# EAGLE board uc_relais_battery_devel_rev_a_3.3.2014 (EAGLE 6.5.0), part 1 of 2
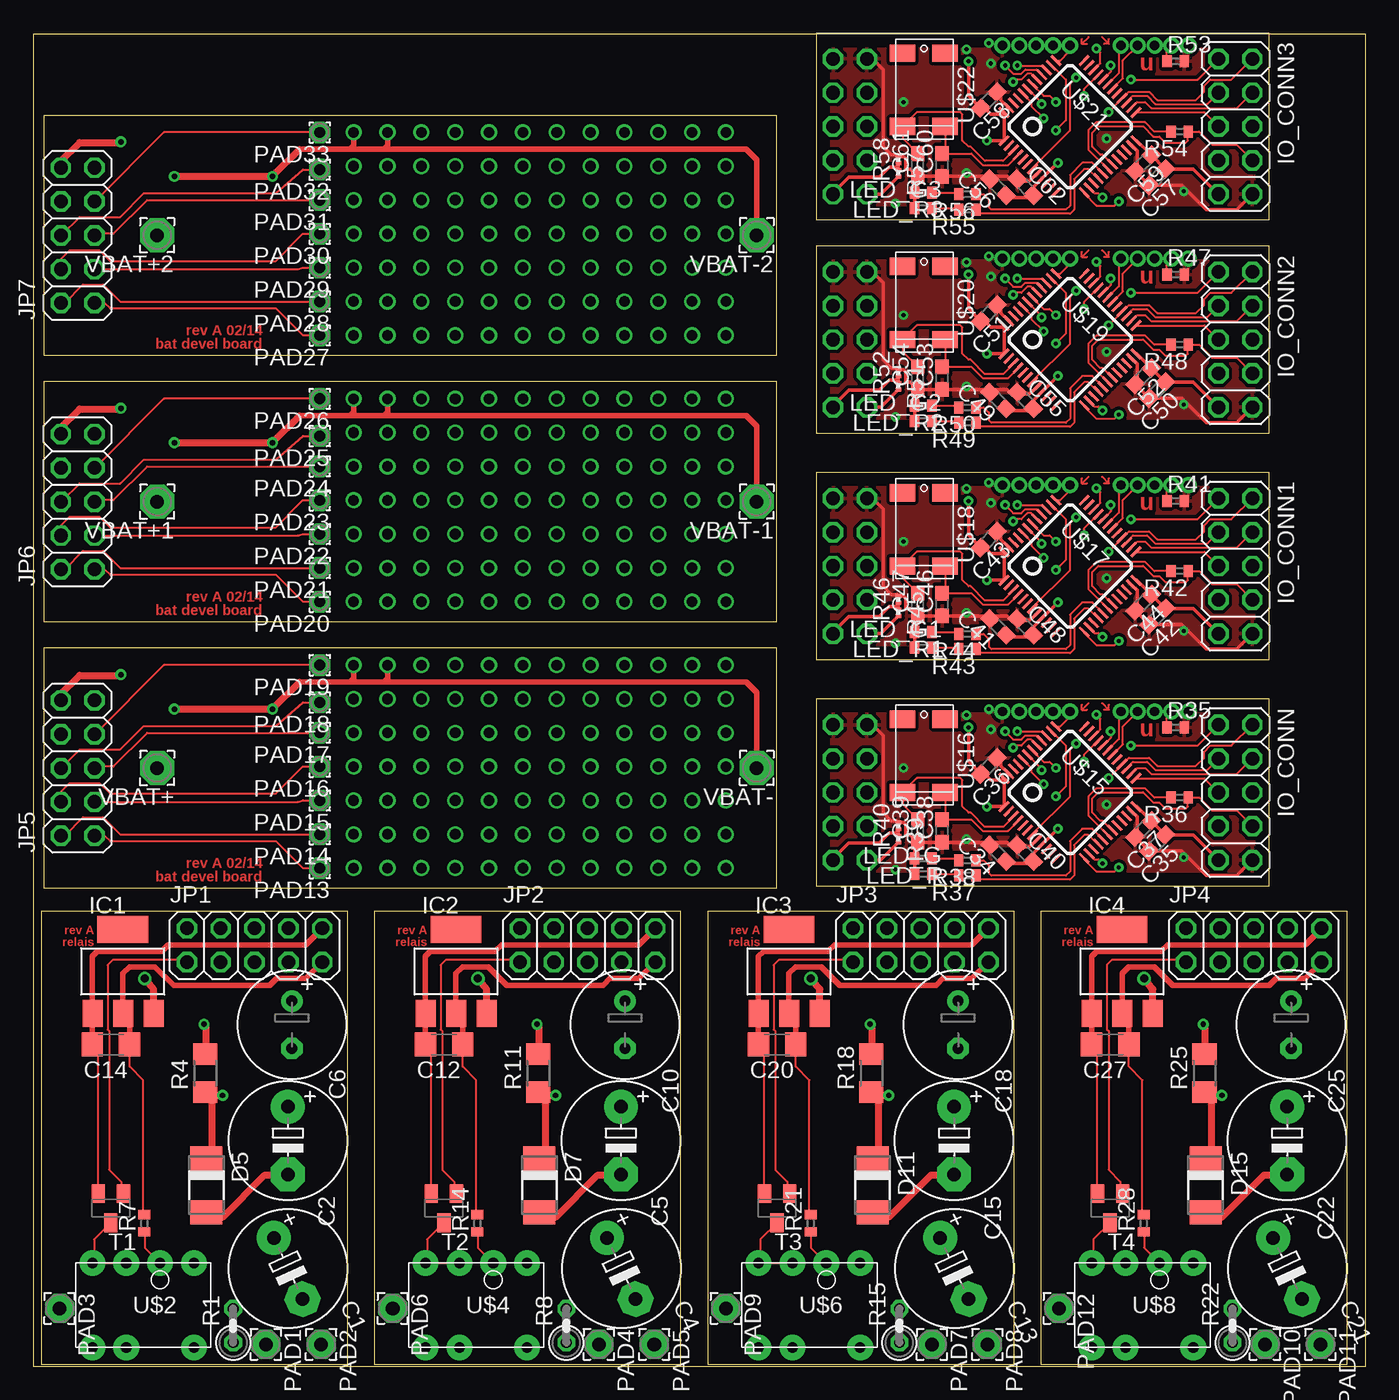
[diagram p0: board, top side]
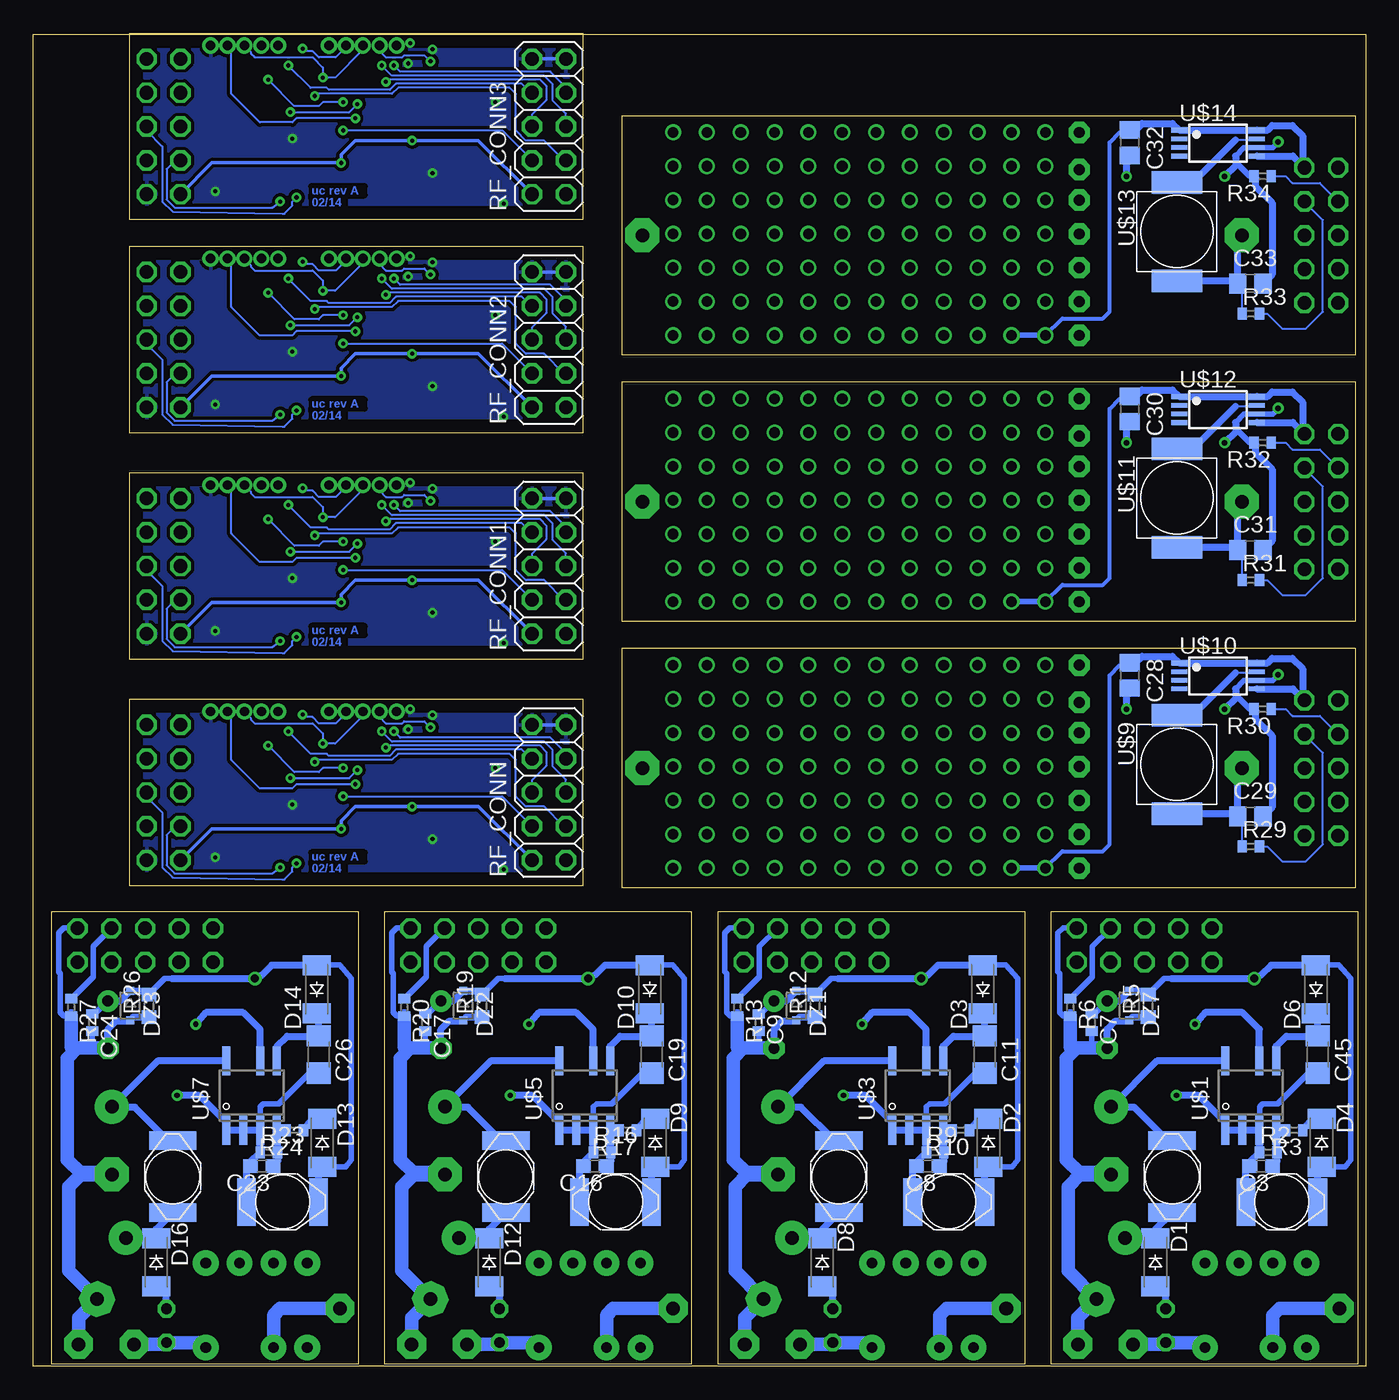
[diagram p1: board, bottom side, seen from below]

Size 100 x 100.08 mm. Coordinates in mm from the lower left corner, seen from the top.
Outline: 0,0 100,0 100,100 0,100 0,0
Outline: 23.61,0.14 23.61,34.14 0.6,34.14 0.6,0.14 23.61,0.14
Outline: 48.6,0.14 48.6,34.14 25.61,34.14 25.61,0.14 48.6,0.14
Outline: 73.61,0.14 73.61,34.14 50.6,34.14 50.6,0.14 73.61,0.14
Outline: 98.61,0.14 98.61,34.14 75.61,34.14 75.61,0.14 98.61,0.14
Outline: 55.79,53.91 0.79,53.91 0.79,35.91 55.79,35.91 55.79,53.91
Outline: 55.79,73.91 0.79,73.91 0.79,55.91 55.79,55.91 55.79,73.91
Outline: 55.79,93.91 0.79,93.91 0.79,75.91 55.79,75.91 55.79,93.91
Outline: 58.76,36.08 92.76,36.08 92.76,50.08 58.76,50.08 58.76,36.08
Outline: 58.76,53.08 92.76,53.08 92.76,67.08 58.76,67.08 58.76,53.08
Outline: 58.76,70.08 92.76,70.08 92.76,84.08 58.76,84.08 58.76,70.08
Outline: 58.76,86.08 92.76,86.08 92.76,100.08 58.76,100.08 58.76,86.08
Copper layers (1*16): Top 0.035mm / dielectric 1.5mm / Bottom 0.035mm
Design rules "default": minimum track width 10mil, minimum drill 24mil, track to track 8mil, track to pad 8mil, pad to pad 8mil, via to via 8mil, smd to smd 8mil, copper to edge 40mil, drill to drill 8mil, minimum pad ring 10mil, minimum via ring 8mil, stop-mask expansion 4mil, vias tented up to drill 0mil, thermal gap 10mil

## Footprints (pad centres in the part's own frame; a part is rotated, then mirrored left to right if it is on the bottom)
E5-8,5 = drill 1.016 pad 2.54: + -2.54,0 | drill 1.016 pad 2.54 octagon: - 2.54,0
C0603 = smd 1.1 x 1: 1 -0.85,0; 2 0.85,0
E3,5-8 = drill 0.813 pad 1.6: + -1.778,0 | drill 0.813 pad 1.6 octagon: - 1.778,0
C0402 = smd 0.7 x 0.9: 1 -0.65,0; 2 0.65,0
C1206 = smd 1.6 x 1.8: 1 -1.4,0; 2 1.4,0
C0805 = smd 1.3 x 1.5: 1 -0.95,0; 2 0.95,0
SOD-123_MINI-SMA = smd 1.5 x 2.1: A 1.8,0; C -1.8,0
DO-214AC = smd 1.8 x 2.4: A 2.025,0; C -2.025,0
05HEADER = drill 0.711 pad 0.762: P$1 -2.54,0; P$2 -1.27,0; P$3 0,0; P$4 1.27,0; P$5 2.54,0
SOD323-R = smd 0.6 x 0.6: A 1.1,0; C -1.1,0
SOT223 = smd 1.499 x 2.007: 1 -2.261,-3.15; 2 0.025,-3.15; 3 2.311,-3.15 | smd 3.81 x 2.007: 4 0,3.15
2X05 = drill 1.016 octagon: 1 -5.08,-1.27; 2 -5.08,1.27; 3 -2.54,-1.27; 4 -2.54,1.27; 5 0,-1.27; 6 0,1.27; 7 2.54,-1.27; 8 2.54,1.27; 9 5.08,-1.27; 10 5.08,1.27
INDUCTOR = smd 1.4 x 3.56: P$1 -2.7,0; P$2 2.7,0
R0402 = smd 0.7 x 0.9: 1 -0.65,0; 2 0.65,0
2,15/1,0 = drill 1.016 pad 2.159 octagon: 1 0,0
1,6/0,8 = drill 0.813 pad 1.6 octagon: 1 0,0
0207/2V = drill 0.813 octagon: 1 -1.27,0; 2 1.27,0
R1206 = smd 1.6 x 1.803: 1 -1.422,0; 2 1.422,0
R0603 = smd 1 x 1.1: 1 -0.85,0; 2 0.85,0
R0201 = smd 0.28 x 0.43: 1 -0.255,0; 2 0.255,0
SOT23-BEC = smd 1 x 1.4: B -0.95,-1.1; C 0,1.1; E 0.95,-1.1
SO7 = smd 0.6 x 2.2: 1 -2.375,-2.56; 2 -1.105,-2.56; 3 0.165,-2.56; 4 1.435,-2.56; 5 1.435,2.64; 6 0.165,2.64; 7 -2.375,2.64
DIP7 = drill 0.8 pad 1.93: P$1 -5.08,-2.54; P$2 -2.54,-2.54; P$3 0,-2.54; P$4 2.54,-2.54; P$5 2.54,3.81; P$6 0,3.81; P$7 -5.08,3.81
ELL6_INDUCTOR = smd 1.7 x 3.8: P$1 -3.7,0; P$2 3.7,0
TSSOP8 = smd 1.2 x 0.35: 1 -2.925,0.975; 2 -2.925,0.325; 3 -2.925,-0.325; 4 -2.925,-0.975; 5 2.925,-0.975; 6 2.925,-0.325; 7 2.925,0.325; 8 2.925,0.975
LQFP48 = smd 0.2 x 1: 1 -2.75,-4.25; 2 -2.25,-4.25; 3 -1.75,-4.25; 4 -1.25,-4.25; 5 -0.75,-4.25; 6 -0.25,-4.25; 7 0.25,-4.25; 8 0.75,-4.25; 9 1.25,-4.25; 10 1.75,-4.25; 11 2.25,-4.25; 12 2.75,-4.25; 25 2.75,4.25; 26 2.25,4.25; 27 1.75,4.25; 28 1.25,4.25; 29 0.75,4.25; 30 0.25,4.25; 31 -0.25,4.25; 32 -0.75,4.25; 33 -1.25,4.25; 34 -1.75,4.25; 35 -2.25,4.25; 36 -2.75,4.25 | smd 1 x 0.2: 13 4.25,-2.75; 14 4.25,-2.25; 15 4.25,-1.75; 16 4.25,-1.25; 17 4.25,-0.75; 18 4.25,-0.25; 19 4.25,0.25; 20 4.25,0.75; 21 4.25,1.25; 22 4.25,1.75; 23 4.25,2.25; 24 4.25,2.75; 37 -4.25,2.75; 38 -4.25,2.25; 39 -4.25,1.75; 40 -4.25,1.25; 41 -4.25,0.75; 42 -4.25,0.25; 43 -4.25,-0.25; 44 -4.25,-0.75; 45 -4.25,-1.25; 46 -4.25,-1.75; 47 -4.25,-2.25; 48 -4.25,-2.75
SOJ4 = smd 1.3 x 1.9: P$1 -2.75,-1.6; P$2 2.75,-1.6; P$3 2.75,1.6; P$4 -2.75,1.6
2,54/1,0 = drill 1.016 pad 2.54 octagon: 1 0,0

## Placement (x,y rotation side)
C1  [E5-8,5]  19.13,7.33 295 top
C2  [E5-8,5]  19.11,16.94 270 top
C3  [C0603]  7.85,15.02 180 bottom
C4  [E5-8,5]  44.13,7.33 295 top
C5  [E5-8,5]  44.1,16.94 270 top
C6  [E3,5-8]  19.41,25.64 270 top
C7  [C0402]  20.57,25.81 270 bottom
C8  [C0603]  32.85,15.02 180 bottom
C9  [C0402]  45.57,25.81 270 bottom
C10  [E3,5-8]  44.41,25.64 270 top
C11  2.2u  [C1206]  28.58,23.4 270 bottom
C12  2.2u  [C1206]  30.82,24.14 180 top
C13  [E5-8,5]  69.13,7.33 295 top
C14  2.2u  [C1206]  5.83,24.14 180 top
C15  [E5-8,5]  69.11,16.94 270 top
C16  [C0603]  57.85,15.02 180 bottom
C17  [C0402]  70.57,25.81 270 bottom
C18  [E3,5-8]  69.41,25.64 270 top
C19  2.2u  [C1206]  53.58,23.4 270 bottom
C20  2.2u  [C1206]  55.83,24.14 180 top
C21  [E5-8,5]  94.13,7.33 295 top
C22  [E5-8,5]  94.11,16.94 270 top
C23  [C0603]  82.85,15.02 180 bottom
C24  [C0402]  95.57,25.81 270 bottom
C25  [E3,5-8]  94.41,25.64 270 top
C26  2.2u  [C1206]  78.58,23.4 270 bottom
C27  2.2u  [C1206]  80.83,24.14 180 top
C28  22u  [C0805]  17.71,51.87 270 bottom
C29  22u  [C0805]  8.65,41.29 0 bottom
C30  22u  [C0805]  17.71,71.87 270 bottom
C31  22u  [C0805]  8.65,61.29 0 bottom
C32  22u  [C0805]  17.71,91.87 270 bottom
C33  22u  [C0805]  8.65,81.29 0 bottom
C34  4u7  [C0603]  72.4,38.51 135 top
C35  4u7  [C0603]  84.36,39.28 225 top
C36  100n  [C0603]  71.71,45.07 225 top
C37  100n  [C0603]  83.3,40.34 225 top
C38  7p  [C0603]  68.21,40.19 90 top
C39  7p  [C0603]  66.38,40.19 90 top
C40  100n  [C0603]  74.46,38.51 315 top
C41  4u7  [C0603]  72.4,55.51 135 top
C42  4u7  [C0603]  84.36,56.28 225 top
C43  100n  [C0603]  71.71,62.07 225 top
C44  100n  [C0603]  83.3,57.34 225 top
C45  2.2u  [C1206]  3.58,23.4 270 bottom
C46  7p  [C0603]  68.21,57.19 90 top
C47  7p  [C0603]  66.38,57.19 90 top
C48  100n  [C0603]  74.46,55.51 315 top
C49  4u7  [C0603]  72.4,72.51 135 top
C50  4u7  [C0603]  84.36,73.28 225 top
C51  100n  [C0603]  71.71,79.07 225 top
C52  100n  [C0603]  83.3,74.34 225 top
C53  7p  [C0603]  68.21,74.19 90 top
C54  7p  [C0603]  66.38,74.19 90 top
C55  100n  [C0603]  74.46,72.51 315 top
C56  4u7  [C0603]  72.4,88.51 135 top
C57  4u7  [C0603]  84.36,89.28 225 top
C58  100n  [C0603]  71.71,95.07 225 top
C59  100n  [C0603]  83.3,90.34 225 top
C60  7p  [C0603]  68.21,90.19 90 top
C61  7p  [C0603]  66.38,90.19 90 top
C62  100n  [C0603]  74.46,88.51 315 top
D1  CGRM4001-G  [SOD-123_MINI-SMA]  15.78,7.79 270 bottom
D2  CGRM4001-G  [SOD-123_MINI-SMA]  28.31,16.77 270 bottom
D3  CGRM4001-G  [SOD-123_MINI-SMA]  28.73,28.3 90 bottom
D4  CGRM4001-G  [SOD-123_MINI-SMA]  3.31,16.77 270 bottom
D5  [DO-214AC]  12.99,13.59 270 top
D6  CGRM4001-G  [SOD-123_MINI-SMA]  3.73,28.3 90 bottom
D7  [DO-214AC]  37.99,13.59 270 top
D8  CGRM4001-G  [SOD-123_MINI-SMA]  40.78,7.79 270 bottom
D9  CGRM4001-G  [SOD-123_MINI-SMA]  53.31,16.77 270 bottom
D10  CGRM4001-G  [SOD-123_MINI-SMA]  53.73,28.3 90 bottom
D11  [DO-214AC]  62.99,13.59 270 top
D12  CGRM4001-G  [SOD-123_MINI-SMA]  65.78,7.79 270 bottom
D13  CGRM4001-G  [SOD-123_MINI-SMA]  78.31,16.77 270 bottom
D14  CGRM4001-G  [SOD-123_MINI-SMA]  78.73,28.3 90 bottom
D15  [DO-214AC]  87.99,13.59 270 top
D16  CGRM4001-G  [SOD-123_MINI-SMA]  90.78,7.79 270 bottom
DBG  [05HEADER]  75.27,49.16 180 top
DBG1  [05HEADER]  75.27,66.16 180 top
DBG2  [05HEADER]  75.27,83.16 180 top
DBG3  [05HEADER]  75.27,99.16 180 top
DZ1  [SOD323-R]  42.74,27.07 270 bottom
DZ2  [SOD323-R]  67.74,27.07 270 bottom
DZ3  [SOD323-R]  92.74,27.07 270 bottom
DZ7  [SOD323-R]  17.74,27.07 270 bottom
IC1  REG1117  [SOT223]  6.72,29.64 0 top
IC2  REG1117  [SOT223]  31.72,29.64 0 top
IC3  REG1117  [SOT223]  56.72,29.64 0 top
IC4  REG1117  [SOT223]  81.72,29.64 0 top
IO_CONN  [2X05]  90.22,43.08 270 top
IO_CONN1  [2X05]  90.22,60.08 270 top
IO_CONN2  [2X05]  90.22,77.08 270 top
IO_CONN3  [2X05]  90.22,93.08 270 top
JP1  [2X05]  16.61,31.6 0 top
JP2  [2X05]  41.6,31.6 0 top
JP3  [2X05]  66.61,31.6 0 top
JP4  [2X05]  91.61,31.6 0 top
JP5  [2X05]  3.33,44.91 90 top
JP6  [2X05]  3.33,64.91 90 top
JP7  [2X05]  3.33,84.91 90 top
L1  INDUCTOR  [INDUCTOR]  14.53,14.23 90 bottom
L2  INDUCTOR  [INDUCTOR]  6.29,12.33 180 bottom
L3  INDUCTOR  [INDUCTOR]  39.53,14.23 90 bottom
L4  INDUCTOR  [INDUCTOR]  31.3,12.33 180 bottom
L5  INDUCTOR  [INDUCTOR]  64.53,14.23 90 bottom
L6  INDUCTOR  [INDUCTOR]  56.3,12.33 180 bottom
L7  INDUCTOR  [INDUCTOR]  89.53,14.23 90 bottom
L8  INDUCTOR  [INDUCTOR]  81.3,12.33 180 bottom
LED_G  [R0402]  66.79,36.95 180 top
LED_G1  [R0402]  66.79,53.95 180 top
LED_G2  [R0402]  66.79,70.95 180 top
LED_G3  [R0402]  66.79,86.95 180 top
LED_R  [R0402]  66.79,38.11 180 top
LED_R1  [R0402]  66.79,55.11 180 top
LED_R2  [R0402]  66.79,72.11 180 top
LED_R3  [R0402]  66.79,88.11 180 top
PAD1  [2,15/1,0]  17.45,1.64 270 top
PAD2  [2,15/1,0]  21.61,1.64 270 top
PAD3  [2,15/1,0]  1.98,4.34 270 top
PAD4  [2,15/1,0]  42.45,1.64 270 top
PAD5  [2,15/1,0]  46.6,1.64 270 top
PAD6  [2,15/1,0]  26.98,4.34 270 top
PAD7  [2,15/1,0]  67.45,1.64 270 top
PAD8  [2,15/1,0]  71.61,1.64 270 top
PAD9  [2,15/1,0]  51.98,4.34 270 top
PAD10  [2,15/1,0]  92.45,1.64 270 top
PAD11  [2,15/1,0]  96.61,1.64 270 top
PAD12  [2,15/1,0]  76.98,4.34 270 top
PAD13  [1,6/0,8]  21.5,37.4 180 top
PAD14  [1,6/0,8]  21.5,39.94 180 top
PAD15  [1,6/0,8]  21.5,42.48 180 top
PAD16  [1,6/0,8]  21.5,45.02 180 top
PAD17  [1,6/0,8]  21.5,47.56 180 top
PAD18  [1,6/0,8]  21.5,49.84 180 top
PAD19  [1,6/0,8]  21.5,52.64 180 top
PAD20  [1,6/0,8]  21.5,57.4 180 top
PAD21  [1,6/0,8]  21.5,59.94 180 top
PAD22  [1,6/0,8]  21.5,62.48 180 top
PAD23  [1,6/0,8]  21.5,65.02 180 top
PAD24  [1,6/0,8]  21.5,67.56 180 top
PAD25  [1,6/0,8]  21.5,69.84 180 top
PAD26  [1,6/0,8]  21.5,72.64 180 top
PAD27  [1,6/0,8]  21.5,77.4 180 top
PAD28  [1,6/0,8]  21.5,79.94 180 top
PAD29  [1,6/0,8]  21.5,82.48 180 top
PAD30  [1,6/0,8]  21.5,85.02 180 top
PAD31  [1,6/0,8]  21.5,87.56 180 top
PAD32  [1,6/0,8]  21.5,89.84 180 top
PAD33  [1,6/0,8]  21.5,92.64 180 top
R1  [0207/2V]  15.01,3.04 90 top
R2  [R0402]  7.32,16.07 0 bottom
R3  [R0402]  5.38,17.73 180 bottom
R4  [R1206]  12.9,22.01 90 top
R5  [R0603]  16.32,27.05 90 bottom
R6  1M  [R0402]  22.16,26.94 270 bottom
R7  100  [R0402]  8.34,10.74 90 top
R8  [0207/2V]  40.01,3.04 90 top
R9  [R0402]  32.32,16.07 0 bottom
R10  [R0402]  30.38,17.73 180 bottom
R11  [R1206]  37.9,22.01 90 top
R12  [R0603]  41.32,27.05 90 bottom
R13  1M  [R0402]  47.16,26.94 270 bottom
R14  100  [R0402]  33.34,10.74 90 top
R15  [0207/2V]  65,3.04 90 top
R16  [R0402]  57.32,16.07 0 bottom
R17  [R0402]  55.38,17.73 180 bottom
R18  [R1206]  62.9,22.01 90 top
R19  [R0603]  66.32,27.05 90 bottom
R20  1M  [R0402]  72.16,26.94 270 bottom
R21  100  [R0402]  58.34,10.74 90 top
R22  [0207/2V]  90,3.04 90 top
R23  [R0402]  82.32,16.07 0 bottom
R24  [R0402]  80.38,17.73 180 bottom
R25  [R1206]  87.9,22.01 90 top
R26  [R0603]  91.32,27.05 90 bottom
R27  1M  [R0402]  97.16,26.94 270 bottom
R28  100  [R0402]  83.33,10.74 90 top
R29  0  [R0402]  8.61,39.01 0 bottom
R30  1M  [R0402]  7.73,49.34 180 bottom
R31  0  [R0402]  8.61,59.01 0 bottom
R32  1M  [R0402]  7.73,69.34 180 bottom
R33  0  [R0402]  8.61,79.01 0 bottom
R34  1M  [R0402]  7.73,89.34 180 bottom
R35  10k  [R0402]  85.73,47.96 0 top
R36  1M  [R0402]  86.04,42.7 180 top
R37  1k  [R0402]  70.11,36.84 180 top
R38  1k  [R0402]  70.11,37.98 180 top
R39  0R/NA  [R0201]  64.93,40.57 270 top
R40  0R/NA  [R0201]  64.93,39.57 90 top
R41  10k  [R0402]  85.73,64.96 0 top
R42  1M  [R0402]  86.04,59.7 180 top
R43  1k  [R0402]  70.11,53.84 180 top
R44  1k  [R0402]  70.11,54.98 180 top
R45  0R/NA  [R0201]  64.93,57.57 270 top
R46  0R/NA  [R0201]  64.93,56.57 90 top
R47  10k  [R0402]  85.73,81.96 0 top
R48  1M  [R0402]  86.04,76.7 180 top
R49  1k  [R0402]  70.11,70.84 180 top
R50  1k  [R0402]  70.11,71.98 180 top
R51  0R/NA  [R0201]  64.93,74.57 270 top
R52  0R/NA  [R0201]  64.93,73.57 90 top
R53  10k  [R0402]  85.73,97.96 0 top
R54  1M  [R0402]  86.04,92.7 180 top
R55  1k  [R0402]  70.11,86.84 180 top
R56  1k  [R0402]  70.11,87.98 180 top
R57  0R/NA  [R0201]  64.93,90.57 270 top
R58  0R/NA  [R0201]  64.93,89.57 90 top
RF_CONN  [2X05]  61.3,43.08 90 bottom
RF_CONN1  [2X05]  61.3,60.08 90 bottom
RF_CONN2  [2X05]  61.3,77.08 90 bottom
RF_CONN3  [2X05]  61.3,93.08 90 bottom
T1  MMUN2233  [SOT23-BEC]  5.82,11.87 180 top
T2  MMUN2233  [SOT23-BEC]  30.82,11.87 180 top
T3  MMUN2233  [SOT23-BEC]  55.82,11.87 180 top
T4  MMUN2233  [SOT23-BEC]  80.82,11.87 180 top
U$1  TEA1721  [SO7]  8.15,20.28 0 bottom
U$2  PR3BMF51  [DIP7]  6.98,5.21 180 top
U$3  TEA1721  [SO7]  33.15,20.28 0 bottom
U$4  PR3BMF51  [DIP7]  31.98,5.21 180 top
U$5  TEA1721  [SO7]  58.15,20.28 0 bottom
U$6  PR3BMF51  [DIP7]  56.98,5.21 180 top
U$7  TEA1721  [SO7]  83.15,20.28 0 bottom
U$8  PR3BMF51  [DIP7]  81.98,5.21 180 top
U$9  ELL_INDUCTOR  [ELL6_INDUCTOR]  14.17,45.19 270 bottom
U$10  L6920  [TSSOP8]  11.08,51.83 0 bottom
U$11  ELL_INDUCTOR  [ELL6_INDUCTOR]  14.17,65.19 270 bottom
U$12  L6920  [TSSOP8]  11.08,71.83 0 bottom
U$13  ELL_INDUCTOR  [ELL6_INDUCTOR]  14.17,85.19 270 bottom
U$14  L6920  [TSSOP8]  11.08,91.83 0 bottom
U$15  STM32F051  [LQFP48]  77.81,43.08 315 top
U$16  CRYSTAL_32K  [SOJ4]  66.84,45.83 90 top
U$17  STM32F051  [LQFP48]  77.81,60.08 315 top
U$18  CRYSTAL_32K  [SOJ4]  66.84,62.83 90 top
U$19  STM32F051  [LQFP48]  77.81,77.08 315 top
U$20  CRYSTAL_32K  [SOJ4]  66.84,79.83 90 top
U$21  STM32F051  [LQFP48]  77.81,93.08 315 top
U$22  CRYSTAL_32K  [SOJ4]  66.84,95.83 90 top
UART  [05HEADER]  84.16,49.16 0 top
UART1  [05HEADER]  84.16,66.16 0 top
UART2  [05HEADER]  84.16,83.16 0 top
UART3  [05HEADER]  84.16,99.16 0 top
VBAT+  [2,54/1,0]  9.29,44.91 180 top
VBAT+1  [2,54/1,0]  9.29,64.91 180 top
VBAT+2  [2,54/1,0]  9.29,84.91 180 top
VBAT-  [2,54/1,0]  54.29,44.91 180 top
VBAT-1  [2,54/1,0]  54.29,64.91 180 top
VBAT-2  [2,54/1,0]  54.29,84.91 180 top

## Library data of the parts
C1 C2 C4 C5 C13 C15 C21 C22 = rcl; DIGIKEY: 1189-1633-1-ND
C3 C8 C16 C23 = rcl; DIGIKEY: 399-8979-1-ND
C6 C10 C18 C25 = rcl; DIGIKEY: 493-1043-ND
C7 C9 C17 C24 = rcl; DIGIKEY: 1276-1028-1-ND
C11 C12 C14 C19 C20 C26 C27 C45 = rcl; DIGIKEY: 1276-2723-1-ND
C28-C33 = rcl; DIGIKEY: 1276-1100-1-ND
C34 C35 C41 C42 C49 C50 C56 C57 = rcl; DIGIKEY: 1276-2087-1-ND
C36 C37 C40 C43 C44 C48 C51 C52 C55 C58 C59 C62 = rcl; DIGIKEY: 445-4711-1-ND
C38 C39 C46 C47 C53 C54 C60 C61 = rcl; DIGIKEY: 1276-2136-1-ND
D1 D8 D12 D16 = diode; REICHELT: S 1ML SMD
D2-D4 D6 D9 D10 D13 D14 = diode; REICHELT: ES 1JL SMD
D5 D7 D11 D15 = diode; DIGIKEY: BYG20J-E3/TRGICT-ND
DBG DBG1-DBG3 UART UART1-UART3 = viskos
DZ1-DZ3 DZ7 = diode; DIGIKEY: 568-3810-1-ND
IC1-IC4 = burr-brown; DIGIKEY: AP1117IE33G-13DICT-ND; MPN: REG1117; OC_FARNELL: 1097566; OC_NEWARK: 14P6981
IO_CONN IO_CONN1-IO_CONN3 = pinhead; DIGIKEY: 609-3243-ND
JP1-JP7 RF_CONN RF_CONN1-RF_CONN3 = pinhead; DIGIKEY: S6105-ND
L1 L3 L5 L7 = fastron_pisg_inductors; REICHELT: L-PISG 1,0M
L2 L4 L6 L8 = fastron_pisg_inductors; REICHELT: L-PISR 1,0M
LED_G LED_G1-LED_G3 = rcl; DIGIKEY: 754-1101-1-ND
LED_R LED_R1-LED_R3 = rcl; DIGIKEY: 754-1104-1-ND
PAD1-PAD33 VBAT+ VBAT+1 VBAT+2 VBAT- VBAT-1 VBAT-2 = wirepad
R1 R8 R15 R22 = rcl; DIGIKEY: CF14JT47R0CT-ND
R2 R9 R16 R23 = rcl; DIGIKEY: 1276-3466-1-ND
R3 R10 R17 R24 = rcl; DIGIKEY: RHM18KCDCT-ND
R4 R11 R18 R25 = rcl; DIGIKEY: 311-1.0ERCT-ND
R5 R12 R19 R26 = rcl; DIGIKEY: 311-68KGRCT-ND
R6 R13 R20 R27 R30 R32 R34 R36 R42 R48 R54 = rcl; DIGIKEY: 311-1.00MLRCT-ND
R7 R14 R21 R28 = rcl; DIGIKEY: 311-100JRCT-ND
R29 R31 R33 = rcl; DIGIKEY: 311-0.0JRCT-ND
R35 R41 R47 R53 = rcl; DIGIKEY: 1276-5086-1-ND
R37 R38 R43 R44 R49 R50 R55 R56 = rcl; DIGIKEY: 1276-5062-1-ND
R39 R40 R45 R46 R51 R52 R57 R58 = rcl
T1-T4 = transistor; DIGIKEY: MMUN2233LT1GOSCT-ND
U$1 U$3 U$5 U$7 = tea1721; DIGIKEY: 568-9556-1-ND
U$2 U$4 U$6 U$8 = pr3bmf51_relais; DIGIKEY: 425-2562-5-ND
U$9 U$11 U$13 = ell_inductor; DIGIKEY: PCD1345CT-ND
U$10 U$12 U$14 = l6920_step_up; DIGIKEY: L6920D-ND
U$15 U$17 U$19 U$21 = stm32f051; DIGIKEY: 497-12893-ND
U$16 U$18 U$20 U$22 = crystal_32k; DIGIKEY: 370-1056-1-ND

## Nets
+3V1: C12.1 IC2.2 JP2.9 R14.2
+3V2: C20.1 IC3.2 JP3.9 R21.2
+3V3: C14.1 IC1.2 JP1.9 R7.2
+3V4: C27.1 IC4.2 JP4.9 R28.2
+3V5: C28.1 JP5.9 U$10.1 U$10.5 U$10.8
+3V6: C30.1 JP6.9 U$12.1 U$12.5 U$12.8
+3V7: C32.1 JP7.9 U$14.1 U$14.5 U$14.8
+3V8: C34.1 C35.1 C36.2 C37.1 C40.2 DBG.P$4 IO_CONN.9 R40.1 RF_CONN.2 U$15.1 U$15.9 U$15.24 U$15.48
+3V9: C41.1 C42.1 C43.2 C44.1 C48.2 DBG1.P$4 IO_CONN1.9 R46.1 RF_CONN1.2 U$17.1 U$17.9 U$17.24 U$17.48
+3V10: C49.1 C50.1 C51.2 C52.1 C55.2 DBG2.P$4 IO_CONN2.9 R52.1 RF_CONN2.2 U$19.1 U$19.9 U$19.24 U$19.48
+3V11: C56.1 C57.1 C58.2 C59.1 C62.2 DBG3.P$4 IO_CONN3.9 R58.1 RF_CONN3.2 U$21.1 U$21.9 U$21.24 U$21.48
+12V: C6.+ C7.1 D4.A D6.A DZ7.C IC1.3 L2.P$1 R5.2
+12V1: C9.1 C10.+ D2.A D3.A DZ1.C IC2.3 L4.P$1 R12.2
+12V2: C17.1 C18.+ D9.A D10.A DZ2.C IC3.3 L6.P$1 R19.2
+12V3: C24.1 C25.+ D13.A D14.A DZ3.C IC4.3 L8.P$1 R26.2
GND: C28.2 C29.2 JP5.10 R30.2 U$10.6 VBAT-.1
GND1: C30.2 C31.2 JP6.10 R32.2 U$12.6 VBAT-1.1
GND2: C32.2 C33.2 JP7.10 R34.2 U$14.6 VBAT-2.1
GND3: C34.2 C35.2 C36.1 C37.2 C38.1 C39.1 C40.1 DBG.P$5 IO_CONN.10 LED_G.2 LED_R.2 R35.2 R39.1 RF_CONN.9 RF_CONN.10 U$15.8 U$15.23 U$15.47 UART.P$5
GND4: C41.2 C42.2 C43.1 C44.2 C46.1 C47.1 C48.1 DBG1.P$5 IO_CONN1.10 LED_G1.2 LED_R1.2 R41.2 R45.1 RF_CONN1.9 RF_CONN1.10 U$17.8 U$17.23 U$17.47 UART1.P$5
GND5: C49.2 C50.2 C51.1 C52.2 C53.1 C54.1 C55.1 DBG2.P$5 IO_CONN2.10 LED_G2.2 LED_R2.2 R47.2 R51.1 RF_CONN2.9 RF_CONN2.10 U$19.8 U$19.23 U$19.47 UART2.P$5
GND6: C56.2 C57.2 C58.1 C59.2 C60.1 C61.1 C62.1 DBG3.P$5 IO_CONN3.10 LED_G3.2 LED_R3.2 R53.2 R57.1 RF_CONN3.9 RF_CONN3.10 U$21.8 U$21.23 U$21.47 UART3.P$5
IO_0: JP1.1 T1.B
IO_1: JP2.1 T2.B
IO_2: JP3.1 T3.B
IO_3: JP4.1 T4.B
IO_4: JP5.1 PAD13.1
IO_5: JP5.3 PAD15.1
IO_6: JP5.5 PAD17.1
IO_7: JP5.7 PAD19.1 R29.2
IO_8: JP5.2 PAD14.1
IO_9: JP5.4 PAD16.1
IO_10: JP5.6 PAD18.1
IO_11: JP6.1 PAD20.1
IO_12: JP6.3 PAD22.1
IO_13: JP6.5 PAD24.1
IO_14: JP6.7 PAD26.1 R31.2
IO_15: JP6.2 PAD21.1
IO_16: JP6.4 PAD23.1
IO_17: JP6.6 PAD25.1
IO_18: JP7.1 PAD27.1
IO_19: JP7.3 PAD29.1
IO_20: JP7.5 PAD31.1
IO_21: JP7.7 PAD33.1 R33.2
IO_22: JP7.2 PAD28.1
IO_23: JP7.4 PAD30.1
IO_24: JP7.6 PAD32.1
IO_25: IO_CONN.7 U$15.13
IO_26: IO_CONN.6 U$15.14
IO_27: IO_CONN.1 U$15.42
IO_28: IO_CONN.5 U$15.25
IO_29: IO_CONN.4 U$15.26
IO_30: IO_CONN.3 U$15.27
IO_31: IO_CONN.2 U$15.28 U$15.43
IO_32: IO_CONN1.7 U$17.13
IO_33: IO_CONN1.6 U$17.14
IO_34: IO_CONN1.1 U$17.42
IO_35: IO_CONN1.5 U$17.25
IO_36: IO_CONN1.4 U$17.26
IO_37: IO_CONN1.3 U$17.27
IO_38: IO_CONN1.2 U$17.28 U$17.43
IO_39: IO_CONN2.7 U$19.13
IO_40: IO_CONN2.6 U$19.14
IO_41: IO_CONN2.1 U$19.42
IO_42: IO_CONN2.5 U$19.25
IO_43: IO_CONN2.4 U$19.26
IO_44: IO_CONN2.3 U$19.27
IO_45: IO_CONN2.2 U$19.28 U$19.43
IO_46: IO_CONN3.7 U$21.13
IO_47: IO_CONN3.6 U$21.14
IO_48: IO_CONN3.1 U$21.42
IO_49: IO_CONN3.5 U$21.25
IO_50: IO_CONN3.4 U$21.26
IO_51: IO_CONN3.3 U$21.27
IO_52: IO_CONN3.2 U$21.28 U$21.43
IO_ID: JP1.8 R6.1
IO_ID1: JP2.8 R13.1
IO_ID2: JP3.8 R20.1
IO_ID3: JP4.8 R27.1
IO_ID4: JP5.8 R30.1
IO_ID5: JP6.8 R32.1
IO_ID6: JP7.8 R34.1
IO_ID7: IO_CONN.8 R36.1 U$15.19
IO_ID8: IO_CONN1.8 R42.1 U$17.19
IO_ID9: IO_CONN2.8 R48.1 U$19.19
IO_ID10: IO_CONN3.8 R54.1 U$21.19
IO_ID_ENABLE: R36.2 U$15.18
IO_ID_ENABLE1: R42.2 U$17.18
IO_ID_ENABLE2: R48.2 U$19.18
IO_ID_ENABLE3: R54.2 U$21.18
ISP_ENABLE: R35.1 U$15.44 UART.P$4
ISP_ENABLE1: R41.1 U$17.44 UART1.P$4
ISP_ENABLE2: R47.1 U$19.44 UART2.P$4
ISP_ENABLE3: R53.1 U$21.44 UART3.P$4
LED_G: R37.1 U$15.16
LED_G1: R43.1 U$17.16
LED_G2: R49.1 U$19.16
LED_G3: R55.1 U$21.16
LED_R: R38.1 U$15.17
LED_R1: R44.1 U$17.17
LED_R2: R50.1 U$19.17
LED_R3: R56.1 U$21.17
LIVE: PAD1.1 R1.1 U$2.P$7
LIVE1: PAD4.1 R8.1 U$4.P$7
LIVE2: PAD7.1 R15.1 U$6.P$7
LIVE3: PAD10.1 R22.1 U$8.P$7
N$1: D1.A R1.2
N$2: C1.+ D1.C L1.P$1
N$3: C2.+ L1.P$2 U$1.7
N$4: PAD3.1 U$2.P$6
N$5: R7.1 U$2.P$2
N$6: T1.C U$2.P$3 U$2.P$4
N$7: C45.1 D6.C U$1.5
N$8: R4.2 U$1.6
N$9: C3.2 C45.2 D5.C L2.P$2 R2.1 R4.1 U$1.1 U$1.2 U$1.3
N$10: D4.C R3.1
N$11: C3.1 R2.2 R3.2 U$1.4
N$12: D8.A R8.2
N$13: C4.+ D8.C L3.P$1
N$14: C5.+ L3.P$2 U$3.7
N$15: C11.1 D3.C U$3.5
N$16: R11.2 U$3.6
N$17: C8.2 C11.2 D7.C L4.P$2 R9.1 R11.1 U$3.1 U$3.2 U$3.3
N$18: D2.C R10.1
N$19: C8.1 R9.2 R10.2 U$3.4
N$20: PAD6.1 U$4.P$6
N$21: R14.1 U$4.P$2
N$22: T2.C U$4.P$3 U$4.P$4
N$23: D12.A R15.2
N$24: C13.+ D12.C L5.P$1
N$25: C15.+ L5.P$2 U$5.7
N$26: C19.1 D10.C U$5.5
N$27: R18.2 U$5.6
N$28: C16.2 C19.2 D11.C L6.P$2 R16.1 R18.1 U$5.1 U$5.2 U$5.3
N$29: D9.C R17.1
N$30: C16.1 R16.2 R17.2 U$5.4
N$31: PAD9.1 U$6.P$6
N$32: R21.1 U$6.P$2
N$33: T3.C U$6.P$3 U$6.P$4
N$34: D16.A R22.2
N$35: C21.+ D16.C L7.P$1
N$36: C22.+ L7.P$2 U$7.7
N$37: C26.1 D14.C U$7.5
N$38: R25.2 U$7.6
N$39: C23.2 C26.2 D15.C L8.P$2 R23.1 R25.1 U$7.1 U$7.2 U$7.3
N$40: D13.C R24.1
N$41: C23.1 R23.2 R24.2 U$7.4
N$42: PAD12.1 U$8.P$6
N$43: R28.1 U$8.P$2
N$44: T4.C U$8.P$3 U$8.P$4
N$45: U$9.P$1 U$10.7
N$126: U$11.P$1 U$12.7
N$207: U$13.P$1 U$14.7
N$288: LED_R.1 R38.2
N$289: LED_G.1 R37.2
N$290: R39.2 R40.2 RF_CONN.1
N$291: C39.2 U$15.3 U$16.P$4
N$292: C38.2 U$15.4 U$16.P$1
N$295: LED_R1.1 R44.2
N$296: LED_G1.1 R43.2
N$297: R45.2 R46.2 RF_CONN1.1
N$298: C47.2 U$17.3 U$18.P$4
N$299: C46.2 U$17.4 U$18.P$1
N$302: LED_R2.1 R50.2
N$303: LED_G2.1 R49.2
N$304: R51.2 R52.2 RF_CONN2.1
N$305: C54.2 U$19.3 U$20.P$4
N$306: C53.2 U$19.4 U$20.P$1
N$309: LED_R3.1 R56.2
N$310: LED_G3.1 R55.2
N$311: R57.2 R58.2 RF_CONN3.1
N$312: C61.2 U$21.3 U$22.P$4
N$313: C60.2 U$21.4 U$22.P$1
NEUTRAL: C1.- C2.- C6.- C7.2 C14.2 D5.A DZ7.A IC1.1 JP1.10 PAD2.1 R5.1 R6.2 T1.E
NEUTRAL1: C4.- C5.- C9.2 C10.- C12.2 D7.A DZ1.A IC2.1 JP2.10 PAD5.1 R12.1 R13.2 T2.E
NEUTRAL2: C13.- C15.- C17.2 C18.- C20.2 D11.A DZ2.A IC3.1 JP3.10 PAD8.1 R19.1 R20.2 T3.E
NEUTRAL3: C21.- C22.- C24.2 C25.- C27.2 D15.A DZ3.A IC4.1 JP4.10 PAD11.1 R26.1 R27.2 T4.E
RESET: DBG.P$3 U$15.7 UART.P$3
RESET1: DBG1.P$3 U$17.7 UART1.P$3
RESET2: DBG2.P$3 U$19.7 UART2.P$3
RESET3: DBG3.P$3 U$21.7 UART3.P$3
RF_CE: RF_CONN.3 U$15.33
RF_CE1: RF_CONN1.3 U$17.33
RF_CE2: RF_CONN2.3 U$19.33
RF_CE3: RF_CONN3.3 U$21.33
RF_CSN: RF_CONN.4 U$15.38
RF_CSN1: RF_CONN1.4 U$17.38
RF_CSN2: RF_CONN2.4 U$19.38
RF_CSN3: RF_CONN3.4 U$21.38
RF_IRQ: RF_CONN.8 U$15.32
RF_IRQ1: RF_CONN1.8 U$17.32
RF_IRQ2: RF_CONN2.8 U$19.32
RF_IRQ3: RF_CONN3.8 U$21.32
RF_MI: RF_CONN.7 U$15.40
RF_MI1: RF_CONN1.7 U$17.40
RF_MI2: RF_CONN2.7 U$19.40
RF_MI3: RF_CONN3.7 U$21.40
RF_MO: RF_CONN.6 U$15.41
RF_MO1: RF_CONN1.6 U$17.41
RF_MO2: RF_CONN2.6 U$19.41
RF_MO3: RF_CONN3.6 U$21.41
RF_SCK: RF_CONN.5 U$15.39
RF_SCK1: RF_CONN1.5 U$17.39
RF_SCK2: RF_CONN2.5 U$19.39
RF_SCK3: RF_CONN3.5 U$21.39
RXD: U$15.31 UART.P$1
RXD1: U$17.31 UART1.P$1
RXD2: U$19.31 UART2.P$1
RXD3: U$21.31 UART3.P$1
SWCLK: DBG.P$1 U$15.37
SWCLK1: DBG1.P$1 U$17.37
SWCLK2: DBG2.P$1 U$19.37
SWCLK3: DBG3.P$1 U$21.37
SWDIO: DBG.P$2 U$15.34
SWDIO1: DBG1.P$2 U$17.34
SWDIO2: DBG2.P$2 U$19.34
SWDIO3: DBG3.P$2 U$21.34
TXD: U$15.30 UART.P$2
TXD1: U$17.30 UART1.P$2
TXD2: U$19.30 UART2.P$2
TXD3: U$21.30 UART3.P$2
VBAT: C29.1 R29.1 U$9.P$2 VBAT+.1
VBAT1: C31.1 R31.1 U$11.P$2 VBAT+1.1
VBAT2: C33.1 R33.1 U$13.P$2 VBAT+2.1

## Tracks (layer width: path | path; a pad name or v marks a point on that pad's centre or on a via)
+3V1
  Top 0.152: R14.2 33.24,11.49 33.24,21.48 32.22,22.49 C12.1
  Top 0.406: JP2.9 45.45,29.1 43.27,29.1 42.76,28.59 35.52,28.59 34.13,29.99 32.22,29.99 31.71,29.48 31.71,26.52 IC2.2 32.23,26.01 C12.1
+3V2
  Top 0.152: R21.2 58.24,11.49 58.24,21.48 57.22,22.49 C20.1
  Top 0.406: JP3.9 70.45,29.1 68.27,29.1 67.76,28.59 60.52,28.59 59.13,29.99 57.22,29.99 56.71,29.48 56.71,26.52 IC3.2 57.23,26.01 C20.1
+3V3
  Top 0.152: R7.2 8.24,11.49 8.24,21.48 7.22,22.49 C14.1
  Top 0.406: JP1.9 20.45,29.1 18.27,29.1 17.76,28.59 10.52,28.59 9.13,29.99 7.22,29.99 6.71,29.48 6.71,26.52 IC1.2 7.22,26.01 C14.1
+3V4
  Top 0.152: R28.2 83.24,11.49 83.24,21.48 82.22,22.49 C27.1
  Top 0.406: JP4.9 95.45,29.1 93.27,29.1 92.76,28.59 85.52,28.59 84.13,29.99 82.22,29.99 81.71,29.48 81.71,26.52 IC4.2 82.22,26.01 C27.1
+3V5  (via drill 0.8)
  Bottom 0.305: v24.04,37.4 22.77,38.67 19.73,38.67 19.22,39.17 19.22,51.87 18.46,52.64 17.89,52.64 C28.1
  Bottom 0.406: v24.04,37.4 v26.58,37.4
  Bottom 0.508: C28.1 17.26,52.82 16.78,53.3 14.5,53.3 U$10.1 U$10.8 7.37,52.8 7.03,53.14 5.5,53.14 4.74,52.38 4.74,50.12 JP5.9 5.47,50.85 U$10.5
+3V6  (via drill 0.8)
  Bottom 0.305: v24.04,57.4 22.77,58.67 19.73,58.67 19.22,59.17 19.22,71.87 18.46,72.64 17.89,72.64 C30.1
  Bottom 0.406: v24.04,57.4 v26.58,57.4
  Bottom 0.508: C30.1 17.26,72.82 16.78,73.3 14.5,73.3 U$12.1 U$12.8 7.37,72.8 7.03,73.14 5.5,73.14 4.74,72.38 4.74,70.12 JP6.9 5.47,70.85 U$12.5
+3V7  (via drill 0.8)
  Bottom 0.305: v24.04,77.4 22.77,78.67 19.73,78.67 19.22,79.17 19.22,91.87 18.46,92.64 17.89,92.64 C32.1
  Bottom 0.406: v24.04,77.4 v26.58,77.4
  Bottom 0.508: C32.1 17.26,92.82 16.78,93.3 14.5,93.3 U$14.1 U$14.8 7.37,92.8 7.03,93.14 5.5,93.14 4.74,92.38 4.74,90.12 JP7.9 5.47,90.85 U$14.5
+3V8  (via drill 0.3)
  Top 0.152: U$15.24 82.83,42.02 | v71.57,42.02 v71.56,42.02 | U$15.9 75.74,39.19
  Top 0.254: 82.83,42.02 C37.1 C35.1 87.07,39.88 IO_CONN.9 | RF_CONN.2 63.61,37.99 R40.1 | v70.19,47.96 70.19,45.39 C36.2 71.4,44.47 71.87,44 72.72,44 U$15.48 U$15.1 v71.57,42.02 | 75.74,39.19 v76.9,40.34 | U$15.9 75.69,39.13 75.07,38.51 C40.2 74.9,37.75 73.54,37.75 73.38,37.91 C34.1
  Bottom 0.152: v70.19,47.96 70.65,48.42 72.17,48.42 72.32,48.27 73.54,48.27 74,48.72 DBG.P$4
  Bottom 0.254: RF_CONN.2 66.59,42.02 v71.56,42.02 75.83,42.02 76.9,40.95 v76.9,40.34 86.6,40.34 IO_CONN.9
+3V9  (via drill 0.3)
  Top 0.152: U$17.24 82.83,59.02 | v71.57,59.02 v71.56,59.02 | U$17.9 75.74,56.19
  Top 0.254: 82.83,59.02 C44.1 C42.1 87.07,56.88 IO_CONN1.9 | RF_CONN1.2 63.61,54.99 R46.1 | v70.19,64.96 70.19,62.39 C43.2 71.4,61.47 71.87,61 72.72,61 U$17.48 U$17.1 v71.57,59.02 | 75.74,56.19 v76.9,57.34 | U$17.9 75.69,56.13 75.07,55.51 C48.2 74.9,54.75 73.54,54.75 73.38,54.91 C41.1
  Bottom 0.152: v70.19,64.96 70.65,65.42 72.17,65.42 72.32,65.27 73.54,65.27 74,65.72 DBG1.P$4
  Bottom 0.254: RF_CONN1.2 66.59,59.02 v71.56,59.02 75.83,59.02 76.9,57.95 v76.9,57.34 86.6,57.34 IO_CONN1.9
+3V10  (via drill 0.3)
  Top 0.152: U$19.24 82.83,76.02 | v71.57,76.02 v71.56,76.02 | U$19.9 75.74,73.19
  Top 0.254: 82.83,76.02 C52.1 C50.1 87.07,73.88 IO_CONN2.9 | RF_CONN2.2 63.61,72 R52.1 | v70.19,81.96 70.19,79.39 C51.2 71.4,78.47 71.87,78 72.72,78 U$19.48 U$19.1 v71.57,76.02 | 75.74,73.19 v76.9,74.34 | U$19.9 75.69,73.14 75.07,72.51 75.07,71.92 C55.2 74.9,71.75 73.54,71.75 73.38,71.91 C49.1
  Bottom 0.152: v70.19,81.96 70.65,82.42 72.17,82.42 72.32,82.27 73.54,82.27 74,82.72 DBG2.P$4
  Bottom 0.254: RF_CONN2.2 66.59,76.02 v71.56,76.02 75.83,76.02 76.9,74.95 v76.9,74.34 86.6,74.34 IO_CONN2.9
+3V11  (via drill 0.3)
  Top 0.152: U$21.24 82.83,92.02 | v71.57,92.02 v71.56,92.02 | U$21.9 75.74,89.19
  Top 0.254: 82.83,92.02 C59.1 C57.1 87.07,89.88 IO_CONN3.9 | RF_CONN3.2 63.61,88 R58.1 | v70.19,97.96 70.19,95.39 C58.2 71.4,94.47 71.87,94 72.72,94 U$21.48 U$21.1 v71.57,92.02 | 75.74,89.19 v76.9,90.34 | U$21.9 75.69,89.14 75.07,88.51 75.07,87.92 C62.2 74.9,87.75 73.54,87.75 73.38,87.91 C56.1
  Bottom 0.152: v70.19,97.96 70.65,98.42 72.17,98.42 72.32,98.27 73.54,98.27 74,98.72 DBG3.P$4
  Bottom 0.254: RF_CONN3.2 66.59,92.02 v71.56,92.02 75.83,92.02 76.9,90.95 v76.9,90.34 86.6,90.34 IO_CONN3.9
+12V  (via drill 0.6)
  Top 0.508: IC1.3 9.03,28.31 v8.37,29.1
  Bottom 0.254: 4.23,30.11 D6.A
  Bottom 0.406: C7.1 20.24,26.58 C6.+ | 14.59,29.1 15.12,29.1 R5.2 | 3.6,14.97 1.54,14.97 1.13,15.51 1.13,29.1 2.02,30.11 4.23,30.11
  Bottom 0.508: 8.37,29.23 v8.37,29.1 | v8.37,29.1 7.87,29.34 7.11,30.1 D6.A 4.12,29.99 | L2.P$1 3.6,14.97 D4.A | 14.59,29.1 v8.37,29.1 | C6.+ 18.49,27.42 DZ7.C 16.59,28.17 R5.2
+12V1  (via drill 0.6)
  Top 0.508: IC2.3 34.03,28.31 v33.37,29.1
  Bottom 0.254: 29.23,30.11 D3.A
  Bottom 0.406: C9.1 45.24,26.58 C10.+ | 39.59,29.1 40.12,29.1 R12.2 | 28.59,14.97 26.54,14.97 26.13,15.51 26.13,29.1 27.02,30.11 29.23,30.11
  Bottom 0.508: 33.37,29.23 v33.37,29.1 | v33.37,29.1 32.87,29.34 32.1,30.1 D3.A 29.12,29.99 | L4.P$1 28.59,14.97 D2.A | 39.59,29.1 v33.37,29.1 | C10.+ 43.49,27.42 DZ1.C 41.59,28.17 R12.2
+12V2  (via drill 0.6)
  Top 0.508: IC3.3 59.03,28.31 v58.37,29.1
  Bottom 0.254: 54.23,30.11 D10.A
  Bottom 0.406: C17.1 70.24,26.58 C18.+ | 64.59,29.1 65.12,29.1 R19.2 | 53.59,14.97 51.54,14.97 51.13,15.51 51.13,29.1 52.02,30.11 54.23,30.11
  Bottom 0.508: 58.37,29.23 v58.37,29.1 | v58.37,29.1 57.87,29.34 57.1,30.1 D10.A 54.12,29.99 | L6.P$1 53.59,14.97 D9.A | 64.59,29.1 v58.37,29.1 | C18.+ 68.49,27.42 DZ2.C 66.59,28.17 R19.2
+12V3  (via drill 0.6)
  Top 0.508: IC4.3 84.03,28.31 v83.36,29.1
  Bottom 0.254: 79.23,30.11 D14.A
  Bottom 0.406: C24.1 95.24,26.58 C25.+ | 89.59,29.1 90.12,29.1 R26.2 | 78.59,14.97 76.54,14.97 76.13,15.51 76.13,29.1 77.02,30.11 79.23,30.11
  Bottom 0.508: 83.36,29.23 v83.36,29.1 | v83.36,29.1 82.87,29.34 82.11,30.1 D14.A 79.12,29.99 | L8.P$1 78.59,14.97 D13.A | 89.59,29.1 v83.36,29.1 | C25.+ 93.49,27.42 DZ3.C 91.59,28.17 R26.2
GND  (via drill 0.41, 0.8)
  Top 0.406: VBAT-.1 54.29,50.58 53.51,51.37 26.33,51.37 | 26.33,51.37 23.79,51.37 | 23.79,51.37 19.98,51.37 | v24.04,52.64 24.04,51.62 23.79,51.37 | v26.58,52.64 26.58,51.62 26.33,51.37
  Top 0.508: 19.98,51.37 v17.95,49.33 v10.58,49.33 | JP5.10 2.06,50.47 3.47,51.87 6.52,51.87 v6.57,51.92
  Bottom 0.406: v6.57,51.92 6.99,51.5 U$10.6 8.19,51.47 9.16,51.47 9.77,50.86 9.77,50.4 8.7,49.34 R30.2
  Bottom 0.508: R30.2 8.24,49.2 8.24,48.57 7.03,47.35 7.03,41.96 C29.2 | v17.95,49.33 17.95,50.65 C28.2 | 9.77,50.86 9.77,50.15 v10.58,49.33
GND1  (via drill 0.41, 0.8)
  Top 0.406: VBAT-1.1 54.29,70.58 53.51,71.37 26.33,71.37 | 26.33,71.37 23.79,71.37 | 23.79,71.37 19.98,71.37 | v24.04,72.64 24.04,71.62 23.79,71.37 | v26.58,72.64 26.58,71.62 26.33,71.37
  Top 0.508: 19.98,71.37 v17.95,69.33 v10.58,69.33 | JP6.10 2.06,70.47 3.47,71.87 6.52,71.87 v6.57,71.92
  Bottom 0.406: v6.57,71.92 6.99,71.5 U$12.6 8.19,71.47 9.16,71.47 9.77,70.86 9.77,70.4 8.7,69.34 R32.2
  Bottom 0.508: R32.2 8.24,69.2 8.24,68.57 7.03,67.35 7.03,61.96 C31.2 | v17.95,69.33 17.95,70.65 C30.2 | 9.77,70.86 9.77,70.15 v10.58,69.33
GND2  (via drill 0.41, 0.8)
  Top 0.406: VBAT-2.1 54.29,90.58 53.51,91.37 26.33,91.37 | 26.33,91.37 23.79,91.37 | 23.79,91.37 19.98,91.37 | v24.04,92.64 24.04,91.62 23.79,91.37 | v26.58,92.64 26.58,91.62 26.33,91.37
  Top 0.508: 19.98,91.37 v17.95,89.33 v10.58,89.33 | JP7.10 2.06,90.47 3.47,91.87 6.52,91.87 v6.57,91.92
  Bottom 0.406: v6.57,91.92 6.99,91.5 U$14.6 8.19,91.47 9.16,91.47 9.77,90.86 9.77,90.4 8.7,89.34 R34.2
  Bottom 0.508: R34.2 8.24,89.2 8.24,88.57 7.03,87.35 7.03,81.96 C33.2 | v17.95,89.33 17.95,90.65 C32.2 | 9.77,90.86 9.77,90.15 v10.58,89.33
GND3  (via drill 0.3)
  Top 0.152: U$15.23 82.44,41.66 | 82.84,39.88 C37.2 | U$15.47 | 72.63,45.96 C36.1 | 66.14,39.1 C39.1
  Top 0.254: 82.44,41.66 82.84,41.26 82.84,39.88 | C37.2 C35.2 86.18,38.67 88.02,36.84 90.33,36.84 IO_CONN.10 | U$15.47 72.63,45.07 72.63,45.96 | RF_CONN.10 62.99,48.16 63.79,47.35 63.79,41.56 64.4,40.95 64.81,40.95 R39.1 65.29,40.83 65.47,40.65 65.47,39.88 65.83,39.88 C39.1 C38.1 73.1,39.34 | LED_G.2 LED_R.2 66.14,39.1 | U$15.8 74.76,38.97 74,38.97 C40.1
  Bottom 0.254: RF_CONN.9 RF_CONN.10
  other vias: 71.71,49.33 71.87,47.81 70.04,48.88 86.34,38.21 70.04,39.58 64.7,37.29 65.31,44.91 80.55,42.17
  pour Top (isolate 0.254): 58.76,50.25 93.05,50.25 93.05,36.08 58.76,36.08
  pour Bottom (isolate 0.254): 58.76,50.71 93.51,50.71 93.51,35.77 58.76,35.77
GND4  (via drill 0.3)
  Top 0.152: U$17.23 82.44,58.66 | 82.84,56.88 C44.2 | U$17.47 | 72.63,62.96 C43.1 | 66.14,56.1 C47.1
  Top 0.254: 82.44,58.66 82.84,58.26 82.84,56.88 | C44.2 C42.2 86.18,55.67 88.02,53.84 90.33,53.84 IO_CONN1.10 | U$17.47 72.63,62.07 72.63,62.96 | RF_CONN1.10 62.99,65.16 63.79,64.35 63.79,58.56 64.4,57.95 64.81,57.95 R45.1 65.29,57.83 65.47,57.65 65.47,56.88 65.83,56.88 C47.1 C46.1 73.1,56.34 | LED_G1.2 LED_R1.2 66.14,56.1 | U$17.8 74.76,55.97 74,55.97 C48.1
  Bottom 0.254: RF_CONN1.9 RF_CONN1.10
  other vias: 71.71,66.33 71.87,64.81 70.04,65.88 86.34,55.21 70.04,56.58 64.7,54.29 65.31,61.91 80.55,59.17
  pour Top (isolate 0.254): 58.76,67.25 93.05,67.25 93.05,53.08 58.76,53.08
  pour Bottom (isolate 0.254): 58.76,67.71 93.51,67.71 93.51,52.77 58.76,52.77
GND5  (via drill 0.3)
  Top 0.152: U$19.23 82.44,75.66 | 82.84,73.89 C52.2 | U$19.47 | 72.63,79.96 C51.1 | 66.14,73.1 C54.1
  Top 0.254: 82.44,75.66 82.84,75.26 82.84,73.89 | C52.2 C50.2 86.18,72.67 88.02,70.84 90.33,70.84 IO_CONN2.10 | U$19.47 72.63,79.07 72.63,79.96 | RF_CONN2.10 62.99,82.16 63.79,81.35 63.79,75.56 64.4,74.95 64.81,74.95 R51.1 65.29,74.83 65.47,74.65 65.47,73.89 65.83,73.89 C54.1 C53.1 73.1,73.34 | LED_G2.2 LED_R2.2 66.14,73.1 | U$19.8 74.76,72.97 74,72.97 C55.1
  Bottom 0.254: RF_CONN2.9 RF_CONN2.10
  other vias: 71.71,83.33 71.87,81.81 70.04,82.88 86.34,72.21 70.04,73.58 64.7,71.29 65.31,78.91 80.55,76.17
  pour Top (isolate 0.254): 58.76,84.25 93.05,84.25 93.05,70.08 58.76,70.08
  pour Bottom (isolate 0.254): 58.76,84.71 93.51,84.71 93.51,69.77 58.76,69.77
GND6  (via drill 0.3)
  Top 0.152: U$21.23 82.44,91.66 | 82.84,89.89 C59.2 | U$21.47 | 72.63,95.96 C58.1 | 66.14,89.1 C61.1
  Top 0.254: 82.44,91.66 82.84,91.26 82.84,89.89 | C59.2 C57.2 86.18,88.67 88.02,86.84 90.33,86.84 IO_CONN3.10 | U$21.47 72.63,95.07 72.63,95.96 | RF_CONN3.10 62.99,98.16 63.79,97.35 63.79,91.56 64.4,90.95 64.81,90.95 R57.1 65.29,90.83 65.47,90.65 65.47,89.89 65.83,89.89 C61.1 C60.1 73.1,89.34 | LED_G3.2 LED_R3.2 66.14,89.1 | U$21.8 74.76,88.97 74,88.97 C62.1
  Bottom 0.254: RF_CONN3.9 RF_CONN3.10
  other vias: 71.71,99.33 71.87,97.81 70.04,98.88 86.34,88.21 70.04,89.58 64.7,87.29 65.31,94.91 80.55,92.17
  pour Top (isolate 0.254): 58.76,100.25 93.05,100.25 93.05,86.08 58.76,86.08
  pour Bottom (isolate 0.254): 58.76,100.71 93.51,100.71 93.51,85.77 58.76,85.77
IO_0
  Top 0.152: JP1.1 11.36,30.5 5.95,30.5 5.57,30.11 5.57,25.29 5.7,25.16 5.7,14.75 6.59,13.86 6.59,13.15 T1.B 6.71,13.02
IO_1
  Top 0.152: JP2.1 36.36,30.5 30.95,30.5 30.57,30.11 30.57,25.29 30.7,25.16 30.7,14.75 31.59,13.86 31.59,13.15 T2.B 31.71,13.02
IO_2
  Top 0.152: JP3.1 61.36,30.5 55.95,30.5 55.57,30.11 55.57,25.29 55.7,25.16 55.7,14.75 56.59,13.86 56.59,13.15 T3.B 56.71,13.02
IO_3
  Top 0.152: JP4.1 86.36,30.5 80.95,30.5 80.57,30.11 80.57,25.29 80.7,25.16 80.7,14.75 81.59,13.86 81.59,13.15 T4.B 81.71,13.02
IO_4
  Top 0.152: JP5.1 5.36,39.83 5.76,39.43 18.2,39.43 20.23,37.4 PAD13.1
IO_5
  Top 0.152: JP5.3 19.87,42.37 20.23,42.48 PAD15.1
IO_6
  Top 0.152: PAD17.1 8.55,47.56 6.01,45.02 4.71,45.02 JP5.5
IO_7
  Top 0.152: PAD19.1 9.79,52.64 JP5.7
  Bottom 0.152: R29.2 7.37,39.01 6.26,37.9 4.49,37.9 3.22,39.17 3.22,46.06 JP5.7
IO_8
  Top 0.152: JP5.2 2.34,39.83 3.72,41.21 5.25,41.21 6.52,39.94 PAD14.1
IO_9
  Top 0.152: JP5.4 2.06,43.1 2.71,43.75 4.99,43.75 5.76,42.98 18.2,42.98 20.23,45.02 PAD16.1
IO_10
  Top 0.152: JP5.6 2.09,44.91 3.47,46.29 6.52,46.29 8.3,48.06 18.2,48.06 20.23,49.84 PAD18.1
IO_11
  Top 0.152: JP6.1 5.36,59.83 5.76,59.43 18.2,59.43 20.23,57.4 PAD20.1
IO_12
  Top 0.152: JP6.3 19.87,62.37 20.23,62.48 PAD22.1
IO_13
  Top 0.152: PAD24.1 8.55,67.56 6.01,65.02 4.71,65.02 JP6.5
IO_14
  Top 0.152: PAD26.1 9.79,72.64 JP6.7
  Bottom 0.152: R31.2 7.37,59.01 6.26,57.9 4.49,57.9 3.22,59.17 3.22,66.06 JP6.7
IO_15
  Top 0.152: JP6.2 2.34,59.83 3.72,61.21 5.25,61.21 6.52,59.94 PAD21.1
IO_16
  Top 0.152: JP6.4 2.06,63.1 2.71,63.75 4.99,63.75 5.76,62.98 18.2,62.98 20.23,65.02 PAD23.1
IO_17
  Top 0.152: JP6.6 2.09,64.91 3.47,66.29 6.52,66.29 8.3,68.06 18.2,68.06 20.23,69.84 PAD25.1
IO_18
  Top 0.152: JP7.1 5.36,79.83 5.76,79.43 18.2,79.43 20.23,77.4 PAD27.1
IO_19
  Top 0.152: JP7.3 19.87,82.37 20.23,82.48 PAD29.1
IO_20
  Top 0.152: PAD31.1 8.55,87.56 6.01,85.02 4.71,85.02 JP7.5
IO_21
  Top 0.152: PAD33.1 9.79,92.64 JP7.7
  Bottom 0.152: R33.2 7.37,79.01 6.26,77.9 4.49,77.9 3.22,79.17 3.22,86.06 JP7.7
IO_22
  Top 0.152: JP7.2 2.34,79.83 3.72,81.21 5.25,81.21 6.52,79.94 PAD28.1
IO_23
  Top 0.152: JP7.4 2.06,83.1 2.71,83.75 4.99,83.75 5.76,82.98 18.2,82.98 20.23,85.02 PAD30.1
IO_24
  Top 0.152: JP7.6 2.09,84.91 3.47,86.29 6.52,86.29 8.3,88.06 18.2,88.06 20.23,89.84 PAD32.1
IO_25  (via drill 0.3)
  Top 0.152: U$15.13 78.87,38.06 79.79,37.14 81.16,37.14 v81.47,37.45
  Bottom 0.152: IO_CONN.7 89.35,40.53 90,39.88 90,37.6 89.39,36.99 82.08,36.99 v81.47,37.45
IO_26  (via drill 0.3)
  Top 0.152: U$15.14 79.64,38.06 79.94,38.06 v80.25,37.75
  Bottom 0.152: IO_CONN.6 91.49,42.74 90.31,41.56 90.31,37.45 89.55,36.69 81.31,36.53 81.16,36.53 80.55,37.14 80.55,37.45 v80.25,37.75
IO_27  (via drill 0.3)
  Top 0.152: U$15.42 74.98,46.22 75.83,45.37 76.29,45.37 v76.74,44.91 | v82.38,46.59 87.39,46.59 IO_CONN.1
  Bottom 0.152: v76.74,44.91 78.27,44.91 78.57,44.61 80.4,44.61 v82.38,46.59
IO_28
  Top 0.152: U$15.25 87.89,44.14 IO_CONN.5
IO_29
  Top 0.152: U$15.26 82.84,44.91 83.45,44.91 83.91,44.46 90.33,44.46 IO_CONN.4
IO_30
  Top 0.152: U$15.27 82.05,44.89 82.53,45.37 83.6,45.37 84.21,44.76 88.1,44.76 IO_CONN.3
IO_31  (via drill 0.3)
  Top 0.152: IO_CONN.2 89.93,46.59 88.33,46.59 87.87,46.13 87.87,45.68 87.26,45.07 84.36,45.07 83.75,45.68 82.23,45.68 81.75,45.2 U$15.28 81.7,45.15 v80.71,44.15 | v75.68,44.76 75.68,44.85 U$15.43
  Bottom 0.152: v80.71,44.15 76.29,44.15 v75.68,44.76
IO_32  (via drill 0.3)
  Top 0.152: U$17.13 78.87,55.06 79.79,54.14 81.16,54.14 v81.47,54.45
  Bottom 0.152: IO_CONN1.7 89.35,57.53 90,56.88 90,54.6 89.39,53.99 82.08,53.99 v81.47,54.45
IO_33  (via drill 0.3)
  Top 0.152: U$17.14 79.64,55.06 79.94,55.06 v80.25,54.75
  Bottom 0.152: IO_CONN1.6 91.49,59.74 90.31,58.56 90.31,54.45 89.55,53.69 81.31,53.53 81.16,53.53 80.55,54.14 80.55,54.45 v80.25,54.75
IO_34  (via drill 0.3)
  Top 0.152: U$17.42 74.98,63.22 75.83,62.37 76.29,62.37 v76.74,61.91 | v82.38,63.59 87.39,63.59 IO_CONN1.1
  Bottom 0.152: v76.74,61.91 78.27,61.91 78.57,61.61 80.4,61.61 v82.38,63.59
IO_35
  Top 0.152: U$17.25 87.89,61.14 IO_CONN1.5
IO_36
  Top 0.152: U$17.26 82.84,61.91 83.45,61.91 83.91,61.46 90.33,61.46 IO_CONN1.4
IO_37
  Top 0.152: U$17.27 82.05,61.89 82.53,62.37 83.6,62.37 84.21,61.76 88.1,61.76 IO_CONN1.3
IO_38  (via drill 0.3)
  Top 0.152: IO_CONN1.2 89.93,63.59 88.33,63.59 87.87,63.13 87.87,62.68 87.26,62.07 84.36,62.07 83.75,62.68 82.23,62.68 81.75,62.2 U$17.28 81.7,62.15 v80.71,61.15 | v75.68,61.76 75.68,61.85 U$17.43
  Bottom 0.152: v80.71,61.15 76.29,61.15 v75.68,61.76
IO_39  (via drill 0.3)
  Top 0.152: U$19.13 78.87,72.06 79.79,71.14 81.16,71.14 v81.47,71.45
  Bottom 0.152: IO_CONN2.7 89.35,74.53 90,73.89 90,71.6 89.39,70.99 82.08,70.99 v81.47,71.45
IO_40  (via drill 0.3)
  Top 0.152: U$19.14 79.64,72.06 79.94,72.06 v80.25,71.75
  Bottom 0.152: IO_CONN2.6 91.49,76.75 90.31,75.56 90.31,71.45 89.55,70.69 81.31,70.53 81.16,70.53 80.55,71.14 80.55,71.45 v80.25,71.75
IO_41  (via drill 0.3)
  Top 0.152: U$19.42 74.98,80.22 75.83,79.37 76.29,79.37 v76.74,78.91 | v82.38,80.59 87.39,80.59 IO_CONN2.1
  Bottom 0.152: v76.74,78.91 78.27,78.91 78.57,78.61 80.4,78.61 v82.38,80.59
IO_42
  Top 0.152: U$19.25 87.89,78.14 IO_CONN2.5
IO_43
  Top 0.152: U$19.26 82.84,78.91 83.45,78.91 83.91,78.46 90.33,78.46 IO_CONN2.4
IO_44
  Top 0.152: U$19.27 82.05,78.89 82.53,79.37 83.6,79.37 84.21,78.76 88.1,78.76 IO_CONN2.3
IO_45  (via drill 0.3)
  Top 0.152: IO_CONN2.2 89.93,80.59 88.33,80.59 87.87,80.13 87.87,79.68 87.26,79.07 84.36,79.07 83.75,79.68 82.23,79.68 81.75,79.2 U$19.28 81.7,79.15 v80.71,78.15 | v75.68,78.76 75.68,78.86 U$19.43
  Bottom 0.152: v80.71,78.15 76.29,78.15 v75.68,78.76
IO_46  (via drill 0.3)
  Top 0.152: U$21.13 78.87,88.06 79.79,87.14 81.16,87.14 v81.47,87.45
  Bottom 0.152: IO_CONN3.7 89.35,90.53 90,89.89 90,87.6 89.39,86.99 82.08,86.99 v81.47,87.45
IO_47  (via drill 0.3)
  Top 0.152: U$21.14 79.64,88.06 79.94,88.06 v80.25,87.75
  Bottom 0.152: IO_CONN3.6 91.49,92.75 90.31,91.56 90.31,87.45 89.55,86.69 81.31,86.53 81.16,86.53 80.55,87.14 80.55,87.45 v80.25,87.75
IO_48  (via drill 0.3)
  Top 0.152: U$21.42 74.98,96.22 75.83,95.37 76.29,95.37 v76.74,94.91 | v82.38,96.59 87.39,96.59 IO_CONN3.1
  Bottom 0.152: v76.74,94.91 78.27,94.91 78.57,94.61 80.4,94.61 v82.38,96.59
IO_49
  Top 0.152: U$21.25 87.89,94.14 IO_CONN3.5
IO_50
  Top 0.152: U$21.26 82.84,94.91 83.45,94.91 83.91,94.46 90.33,94.46 IO_CONN3.4
IO_51
  Top 0.152: U$21.27 82.05,94.89 82.53,95.37 83.6,95.37 84.21,94.76 88.1,94.76 IO_CONN3.3
IO_52  (via drill 0.3)
  Top 0.152: IO_CONN3.2 89.93,96.59 88.33,96.59 87.87,96.13 87.87,95.68 87.26,95.07 84.36,95.07 83.75,95.68 82.23,95.68 81.75,95.2 U$21.28 81.7,95.15 v80.71,94.15 | v75.68,94.76 75.68,94.86 U$21.43
  Bottom 0.152: v80.71,94.15 76.29,94.15 v75.68,94.76
IO_ID
  Bottom 0.406: R6.1 21.91,27.84 20.5,29.24 20.5,31.51 JP1.8
IO_ID1
  Bottom 0.406: R13.1 46.91,27.84 45.51,29.24 45.51,31.51 JP2.8
IO_ID2
  Bottom 0.406: R20.1 71.91,27.84 70.5,29.24 70.5,31.51 JP3.8
IO_ID3
  Bottom 0.406: R27.1 96.91,27.84 95.5,29.24 95.5,31.51 JP4.8
IO_ID4
  Bottom 0.152: R30.1 6.01,49.34 5.5,48.83 3.44,48.83 JP5.8
IO_ID5
  Bottom 0.152: R32.1 6.01,69.34 5.5,68.83 3.44,68.83 JP6.8
IO_ID6
  Bottom 0.152: R34.1 6.01,89.34 5.5,88.83 3.44,88.83 JP7.8
IO_ID7
  Top 0.152: U$15.19 80.95,40.25 80.25,40.95 80.1,40.95 79.49,41.56 79.49,42.63 79.94,43.09 83.3,43.09 84.06,42.32 84.52,42.32 84.97,41.87 86.5,41.87 86.65,42.02 86.65,42.66 R36.1 87.49,42.7 88.48,41.71 90.31,41.71 IO_CONN.8
IO_ID8
  Top 0.152: U$17.19 80.95,57.25 80.25,57.95 80.1,57.95 79.49,58.56 79.49,59.63 79.94,60.09 83.3,60.09 84.06,59.32 84.52,59.32 84.97,58.87 86.5,58.87 86.65,59.02 86.65,59.66 R42.1 87.49,59.7 88.48,58.71 90.31,58.71 IO_CONN1.8
IO_ID9
  Top 0.152: U$19.19 80.95,74.25 80.25,74.95 80.1,74.95 79.49,75.56 79.49,76.63 79.94,77.09 83.3,77.09 84.06,76.32 84.52,76.32 84.97,75.87 86.5,75.87 86.65,76.02 86.65,76.66 R48.1 87.49,76.7 88.48,75.71 90.31,75.71 IO_CONN2.8
IO_ID10
  Top 0.152: U$21.19 80.95,90.25 80.25,90.95 80.1,90.95 79.49,91.56 79.49,92.63 79.94,93.09 83.3,93.09 84.06,92.32 84.52,92.32 84.97,91.87 86.5,91.87 86.65,92.02 86.65,92.66 R54.1 87.49,92.7 88.48,91.71 90.31,91.71 IO_CONN3.8
IO_ID_ENABLE
  Top 0.152: R36.2 84.14,42.7 83.45,43.39 79.79,43.39 79.18,42.78 79.18,41.35 U$15.18
IO_ID_ENABLE1
  Top 0.152: R42.2 84.14,59.7 83.45,60.39 79.79,60.39 79.18,59.78 79.18,58.35 U$17.18
IO_ID_ENABLE2
  Top 0.152: R48.2 84.14,76.7 83.45,77.39 79.79,77.39 79.18,76.78 79.18,75.35 U$19.18
IO_ID_ENABLE3
  Top 0.152: R54.2 84.14,92.7 83.45,93.39 79.79,93.39 79.18,92.78 79.18,91.35 U$21.18
ISP_ENABLE  (via drill 0.3)
  Top 0.152: U$15.44 74.91,44.91 74.91,44.61 v75.83,43.7 | R35.1 85.08,48.81 UART.P$4
  Bottom 0.152: v75.83,43.7 80.25,43.7 80.55,43.39 82.99,43.39 85.12,45.52 85.12,48.85 UART.P$4
ISP_ENABLE1  (via drill 0.3)
  Top 0.152: U$17.44 74.91,61.91 74.91,61.61 v75.83,60.7 | R41.1 85.08,65.81 UART1.P$4
  Bottom 0.152: v75.83,60.7 80.25,60.7 80.55,60.39 82.99,60.39 85.12,62.52 85.12,65.85 UART1.P$4
ISP_ENABLE2  (via drill 0.3)
  Top 0.152: U$19.44 74.91,78.91 74.91,78.61 v75.83,77.69 | R47.1 85.08,82.81 UART2.P$4
  Bottom 0.152: v75.83,77.69 80.25,77.69 80.55,77.39 82.99,77.39 85.12,79.52 85.12,82.85 UART2.P$4
ISP_ENABLE3  (via drill 0.3)
  Top 0.152: U$21.44 74.91,94.91 74.91,94.61 v75.83,93.69 | R53.1 85.08,98.81 UART3.P$4
  Bottom 0.152: v75.83,93.69 80.25,93.69 80.55,93.39 82.99,93.39 85.12,95.52 85.12,98.85 UART3.P$4
LED_G
  Top 0.152: U$15.16 79.88,39.19 79.18,39.88 78.88,39.88 78.11,39.12 78.11,36.84 77.81,36.53 71.07,36.53 R37.1
LED_G1
  Top 0.152: U$17.16 79.88,56.19 79.18,56.88 78.88,56.88 78.11,56.12 78.11,53.84 77.81,53.53 71.07,53.53 R43.1
LED_G2
  Top 0.152: U$19.16 79.88,73.19 79.18,73.89 78.88,73.89 78.11,73.12 78.11,70.84 77.81,70.53 71.07,70.53 R49.1
LED_G3
  Top 0.152: U$21.16 79.88,89.19 79.18,89.89 78.88,89.89 78.11,89.12 78.11,86.84 77.81,86.53 71.07,86.53 R55.1
LED_R
  Top 0.152: U$15.17 79.49,40.34 78.72,40.34 77.81,39.43 77.81,37.14 77.5,36.84 71.91,36.84 71.71,37.03 71.71,37.6 71.33,37.98 R38.1
LED_R1
  Top 0.152: U$17.17 79.49,57.34 78.72,57.34 77.81,56.43 77.81,54.14 77.5,53.84 71.91,53.84 71.71,54.03 71.71,54.6 71.33,54.98 R44.1
LED_R2
  Top 0.152: U$19.17 79.49,74.34 78.72,74.34 77.81,73.43 77.81,71.14 77.5,70.84 71.91,70.84 71.71,71.03 71.71,71.6 71.33,71.98 R50.1
LED_R3
  Top 0.152: U$21.17 79.49,90.34 78.72,90.34 77.81,89.43 77.81,87.14 77.5,86.84 71.91,86.84 71.71,87.03 71.71,87.6 71.33,87.98 R56.1
LIVE
  Bottom 1.016: PAD1.1 15.13,1.64 R1.1 12.43,1.77 U$2.P$7
LIVE1
  Bottom 1.016: PAD4.1 40.13,1.64 R8.1 37.42,1.77 U$4.P$7
LIVE2
  Bottom 1.016: PAD7.1 65.14,1.64 R15.1 62.42,1.77 U$6.P$7
LIVE3
  Bottom 1.016: PAD10.1 90.14,1.64 R22.1 87.42,1.77 U$8.P$7
N$1
  Bottom 0.508: R1.2 15.01,5.6 D1.A
N$2
  Bottom 0.508: L1.P$1 15.78,10.28 D1.C 18.02,9.6 C1.+
N$3
  Bottom 0.508: L1.P$2 14.87,16.93 17.38,19.45 19.07,19.45 C2.+ 15.67,22.92 U$1.7
N$4
  Bottom 1.016: PAD3.1 2.11,4.33 6.46,4.33 6.97,3.83 6.97,1.42 U$2.P$6
N$5
  Top 0.152: R7.1 8.37,10.06 8.37,8.91 U$2.P$2
N$6
  Top 0.152: T1.C 4.57,9.52 4.57,7.88 U$2.P$4 U$2.P$3
N$7
  Bottom 0.508: 3.69,24.78 C45.1 | C45.1 3.58,26.48 D6.C | U$1.5 6.71,24.02 5.95,24.78 3.6,24.78 C45.1
N$8  (via drill 0.41)
  Top 0.508: v12.81,25.67 12.94,25.67 12.94,23.46 R4.2
  Bottom 0.508: U$1.6 7.99,25.29 9.25,26.56 12.05,26.56 v12.81,25.67
N$9  (via drill 0.41)
  Top 0.508: D5.C 13.45,15.44 13.45,20.04 R4.1 12.94,20.59 13.19,20.34 | 13.19,20.34 13.06,20.34 | 13.19,20.34 v14.21,20.34
  Bottom 0.406: 7.97,17.7 7.97,19.46 7.73,19.7 6.59,19.7 4.3,21.99 3.59,21.99 C45.2
  Bottom 0.508: L2.P$2 8.99,14.73 C3.2 8.7,15.33 R2.1 7.97,17.7 U$1.3 U$1.2 U$1.1 10.53,18.3 12.56,20.34 v14.21,20.34
N$10
  Bottom 0.508: D4.C 4.08,18.49 R3.1
N$11
  Bottom 0.508: 6.67,17.67 R2.2 6.67,15.36 C3.1 | 6.67,17.67 U$1.4 | 6.67,17.67 6.35,17.67 R3.2
N$12
  Bottom 0.508: R8.2 40.01,5.6 D8.A
N$13
  Bottom 0.508: L3.P$1 40.78,10.28 D8.C 43.02,9.6 C4.+
N$14
  Bottom 0.508: L3.P$2 39.87,16.93 42.38,19.45 44.07,19.45 C5.+ 40.67,22.92 U$3.7
N$15
  Bottom 0.508: 28.7,24.78 C11.1 | C11.1 28.58,26.48 D3.C | U$3.5 31.71,24.02 30.95,24.78 28.6,24.78 C11.1
N$16  (via drill 0.41)
  Top 0.508: v37.81,25.67 37.94,25.67 37.94,23.46 R11.2
  Bottom 0.508: U$3.6 32.98,25.29 34.25,26.56 37.05,26.56 v37.81,25.67
N$17  (via drill 0.41)
  Top 0.508: D7.C 38.45,15.44 38.45,20.04 R11.1 37.94,20.59 38.19,20.34 | 38.19,20.34 38.06,20.34 | 38.19,20.34 v39.21,20.34
  Bottom 0.406: 32.97,17.7 32.97,19.46 32.73,19.7 31.59,19.7 29.3,21.99 28.59,21.99 C11.2
  Bottom 0.508: L4.P$2 33.99,14.73 C8.2 33.7,15.33 R9.1 32.97,17.7 U$3.3 U$3.2 U$3.1 35.52,18.3 37.56,20.34 v39.21,20.34
N$18
  Bottom 0.508: D2.C 29.08,18.49 R10.1
N$19
  Bottom 0.508: 31.67,17.67 R9.2 31.67,15.36 C8.1 | 31.67,17.67 U$3.4 | 31.67,17.67 31.35,17.67 R10.2
N$20
  Bottom 1.016: PAD6.1 27.11,4.33 31.46,4.33 31.97,3.83 31.97,1.42 U$4.P$6
N$21
  Top 0.152: R14.1 33.37,10.06 33.37,8.91 U$4.P$2
N$22
  Top 0.152: T2.C 29.57,9.52 29.57,7.88 U$4.P$4 U$4.P$3
N$23
  Bottom 0.508: R15.2 65,5.6 D12.A
N$24
  Bottom 0.508: L5.P$1 65.78,10.28 D12.C 68.02,9.6 C13.+
N$25
  Bottom 0.508: L5.P$2 64.86,16.93 67.38,19.45 69.07,19.45 C15.+ 65.67,22.92 U$5.7
N$26
  Bottom 0.508: 53.7,24.78 C19.1 | C19.1 53.58,26.48 D10.C | U$5.5 56.72,24.02 55.95,24.78 53.6,24.78 C19.1
N$27  (via drill 0.41)
  Top 0.508: v62.81,25.67 62.94,25.67 62.94,23.46 R18.2
  Bottom 0.508: U$5.6 57.98,25.29 59.25,26.56 62.05,26.56 v62.81,25.67
N$28  (via drill 0.41)
  Top 0.508: D11.C 63.45,15.44 63.45,20.04 R18.1 62.94,20.59 63.19,20.34 | 63.19,20.34 63.06,20.34 | 63.19,20.34 v64.21,20.34
  Bottom 0.406: 57.97,17.7 57.97,19.46 57.73,19.7 56.59,19.7 54.3,21.99 53.59,21.99 C19.2
  Bottom 0.508: L6.P$2 58.99,14.73 C16.2 58.7,15.33 R16.1 57.97,17.7 U$5.3 U$5.2 U$5.1 60.52,18.3 62.56,20.34 v64.21,20.34
N$29
  Bottom 0.508: D9.C 54.08,18.49 R17.1
N$30
  Bottom 0.508: 56.67,17.67 R16.2 56.67,15.36 C16.1 | 56.67,17.67 U$5.4 | 56.67,17.67 56.35,17.67 R17.2
N$31
  Bottom 1.016: PAD9.1 52.11,4.33 56.46,4.33 56.97,3.83 56.97,1.42 U$6.P$6
N$32
  Top 0.152: R21.1 58.37,10.06 58.37,8.91 U$6.P$2
N$33
  Top 0.152: T3.C 54.56,9.52 54.56,7.88 U$6.P$4 U$6.P$3
N$34
  Bottom 0.508: R22.2 90,5.6 D16.A
N$35
  Bottom 0.508: L7.P$1 90.78,10.28 D16.C 93.02,9.6 C21.+
N$36
  Bottom 0.508: L7.P$2 89.86,16.93 92.38,19.45 94.07,19.45 C22.+ 90.67,22.92 U$7.7
N$37
  Bottom 0.508: 78.69,24.78 C26.1 | C26.1 78.58,26.48 D14.C | U$7.5 81.72,24.02 80.95,24.78 78.6,24.78 C26.1
N$38  (via drill 0.41)
  Top 0.508: v87.81,25.67 87.94,25.67 87.94,23.46 R25.2
  Bottom 0.508: U$7.6 82.98,25.29 84.25,26.56 87.05,26.56 v87.81,25.67
N$39  (via drill 0.41)
  Top 0.508: D15.C 88.44,15.44 88.44,20.04 R25.1 87.94,20.59 88.19,20.34 | 88.19,20.34 88.06,20.34 | 88.19,20.34 v89.21,20.34
  Bottom 0.406: 82.97,17.7 82.97,19.46 82.73,19.7 81.59,19.7 79.3,21.99 78.59,21.99 C26.2
  Bottom 0.508: L8.P$2 84,14.73 C23.2 83.7,15.33 R23.1 82.97,17.7 U$7.3 U$7.2 U$7.1 85.53,18.3 87.56,20.34 v89.21,20.34
N$40
  Bottom 0.508: D13.C 79.08,18.49 R24.1
N$41
  Bottom 0.508: 81.67,17.67 R23.2 81.67,15.36 C23.1 | 81.67,17.67 U$7.4 | 81.67,17.67 81.35,17.67 R24.2
N$42
  Bottom 1.016: PAD12.1 77.11,4.33 81.46,4.33 81.97,3.83 81.97,1.42 U$8.P$6
N$43
  Top 0.152: R28.1 83.36,10.06 83.36,8.91 U$8.P$2
N$44
  Top 0.152: T4.C 79.56,9.52 79.56,7.88 U$8.P$4 U$8.P$3
N$45
  Bottom 0.152: 9.77,52.08 8.23,52.08 U$10.7
  Bottom 0.508: U$9.P$1 12.96,48.89 9.77,52.08
N$46  (via drill 0.8)
  other vias: 29.12,37.4
N$47  (via drill 0.8)
  other vias: 31.66,37.4
N$48  (via drill 0.8)
  other vias: 34.2,37.4
N$49  (via drill 0.8)
  other vias: 36.74,37.4
N$50  (via drill 0.8)
  other vias: 39.28,37.4
N$51  (via drill 0.8)
  other vias: 41.82,37.4
N$52  (via drill 0.8)
  other vias: 44.36,37.4
N$53  (via drill 0.8)